# Altium PCB FMC_AWG_DAC_PSU.PcbDoc (part 1 of 2)
Units mm, origin at the board's own origin, x right, y up, seen from the top; angles counter-clockwise.
Board outline 19.1 x 69 mm, 6 copper layers (TOP, L2, L3, L4, L5, BOTTOM), stack 1.482 mm thick; 113 components, 49 nets, 281 pads, 213 vias.
Unrouted connection lines stored in the file: 1.
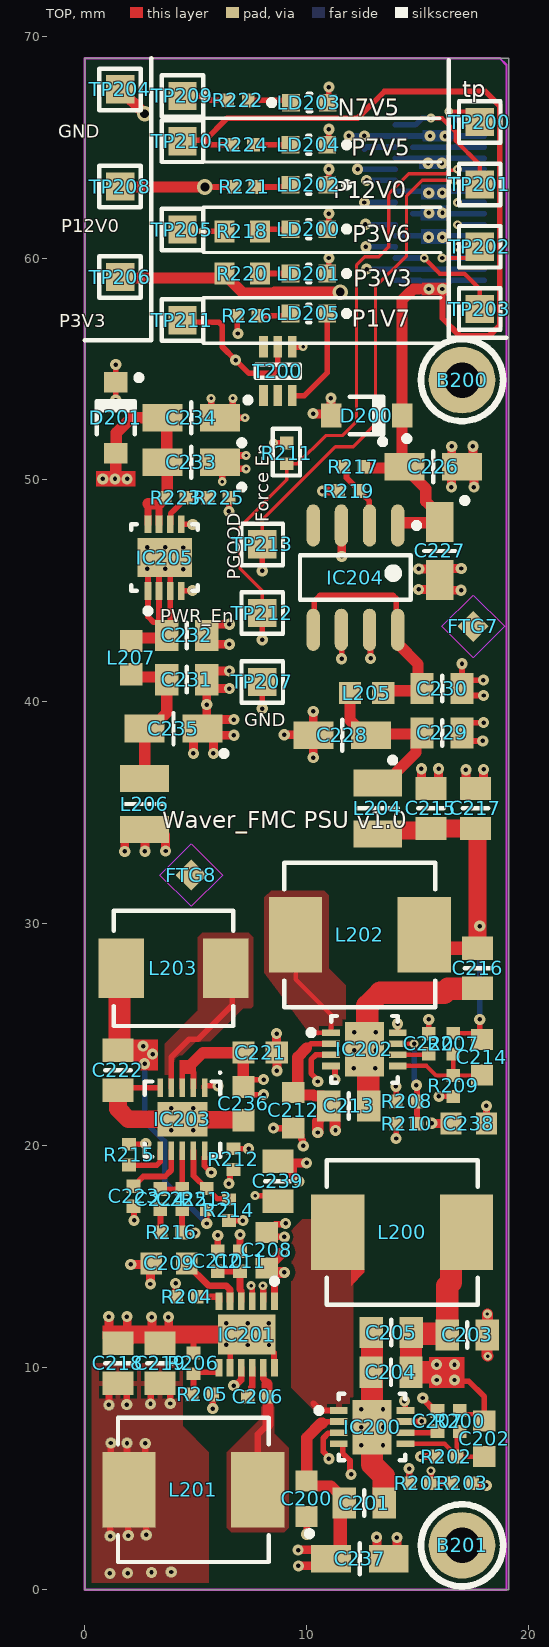
[diagram p0: TOP view]
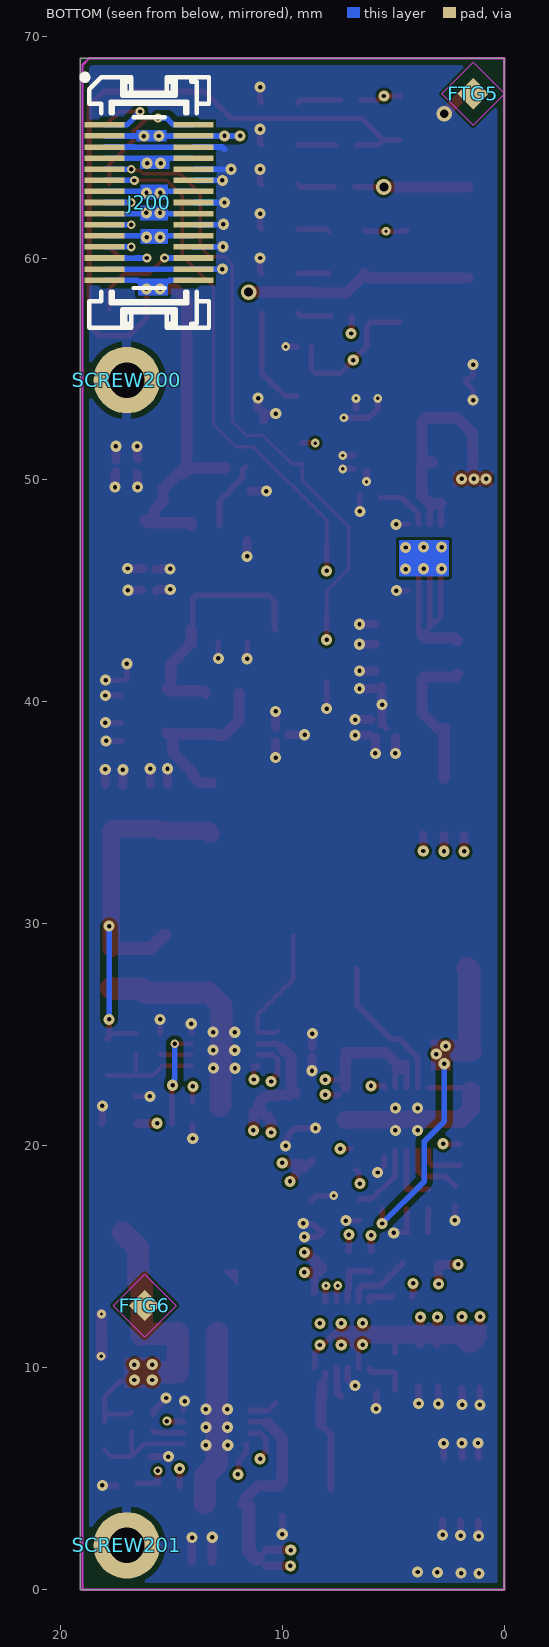
[diagram p1: BOTTOM view, seen from below]
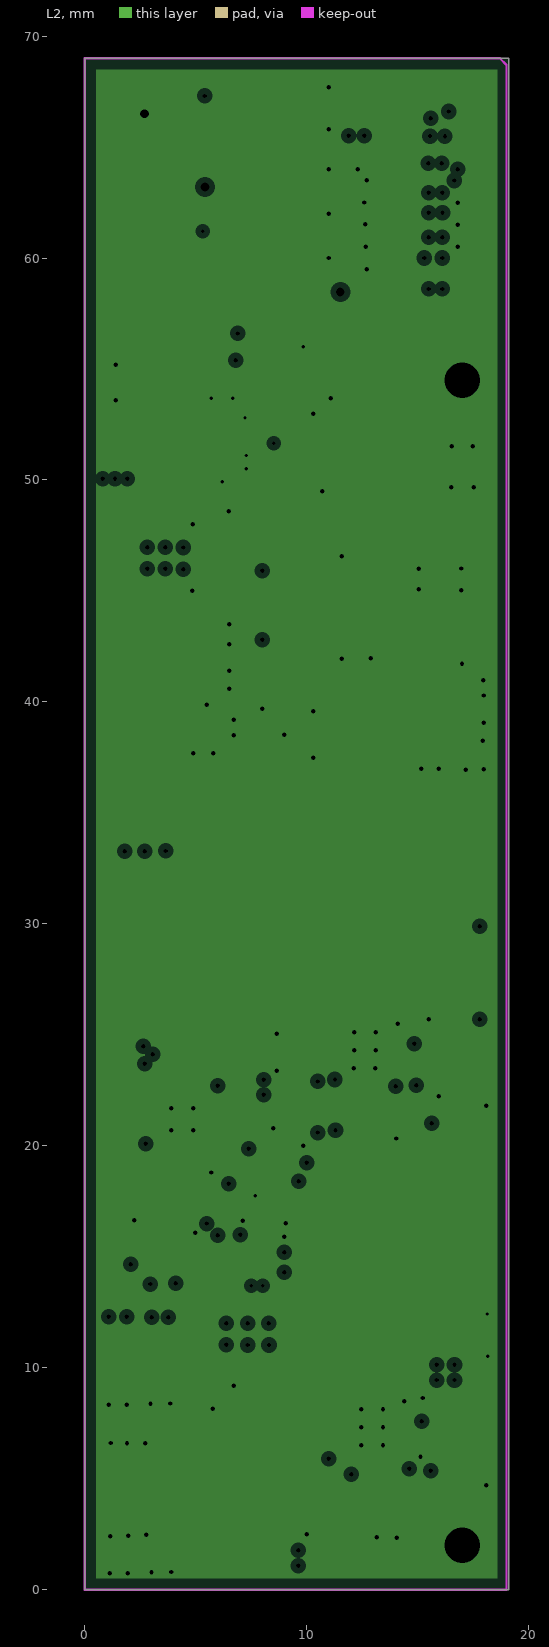
[diagram p2: L2, clearances drawn from the general rule]
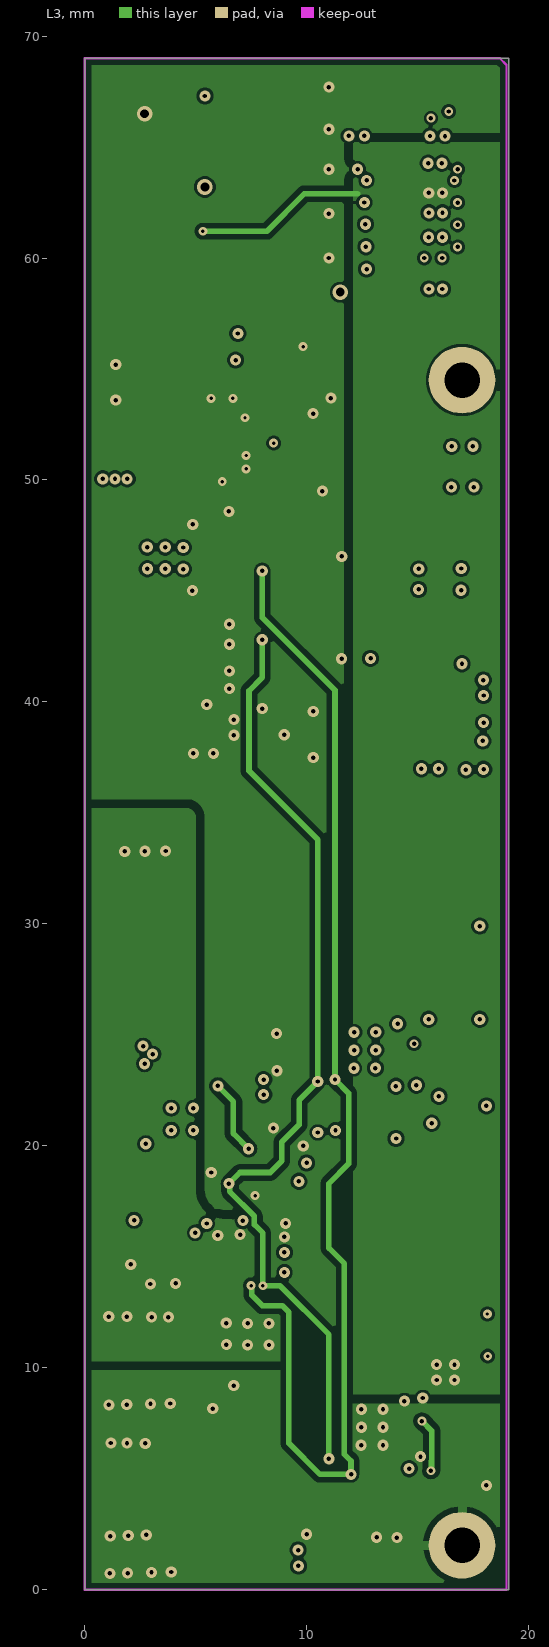
[diagram p3: L3]
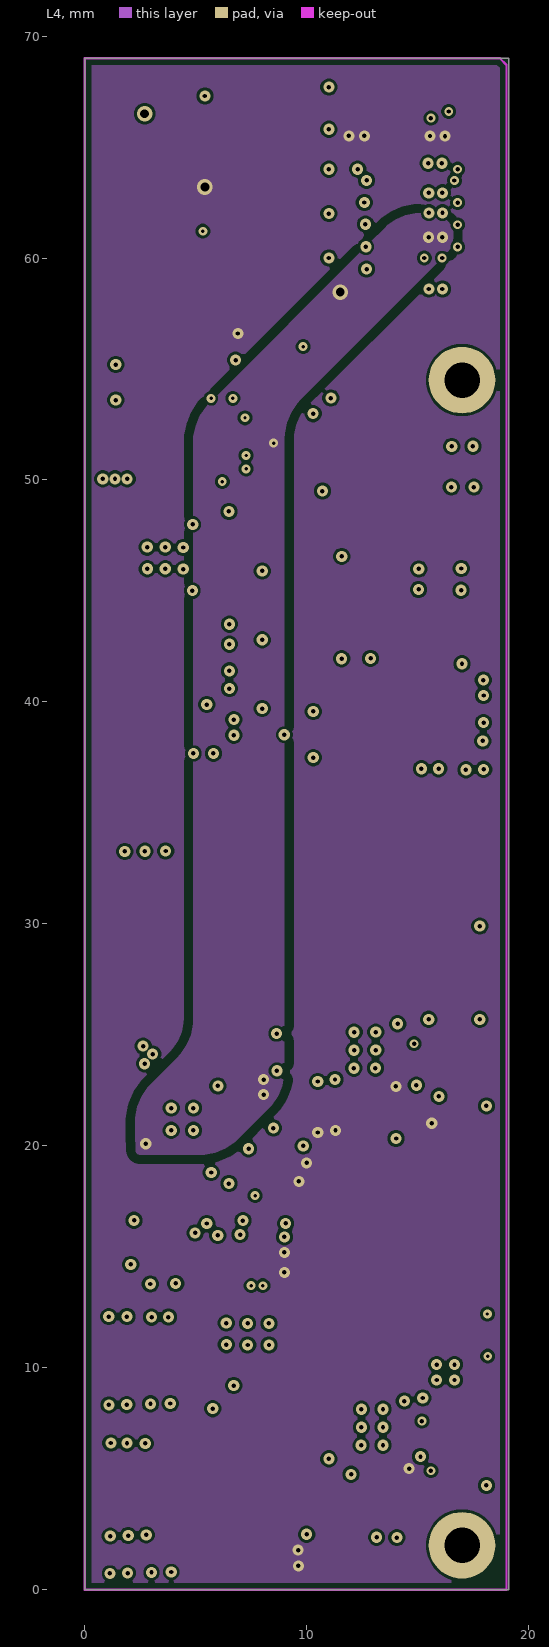
[diagram p4: L4]
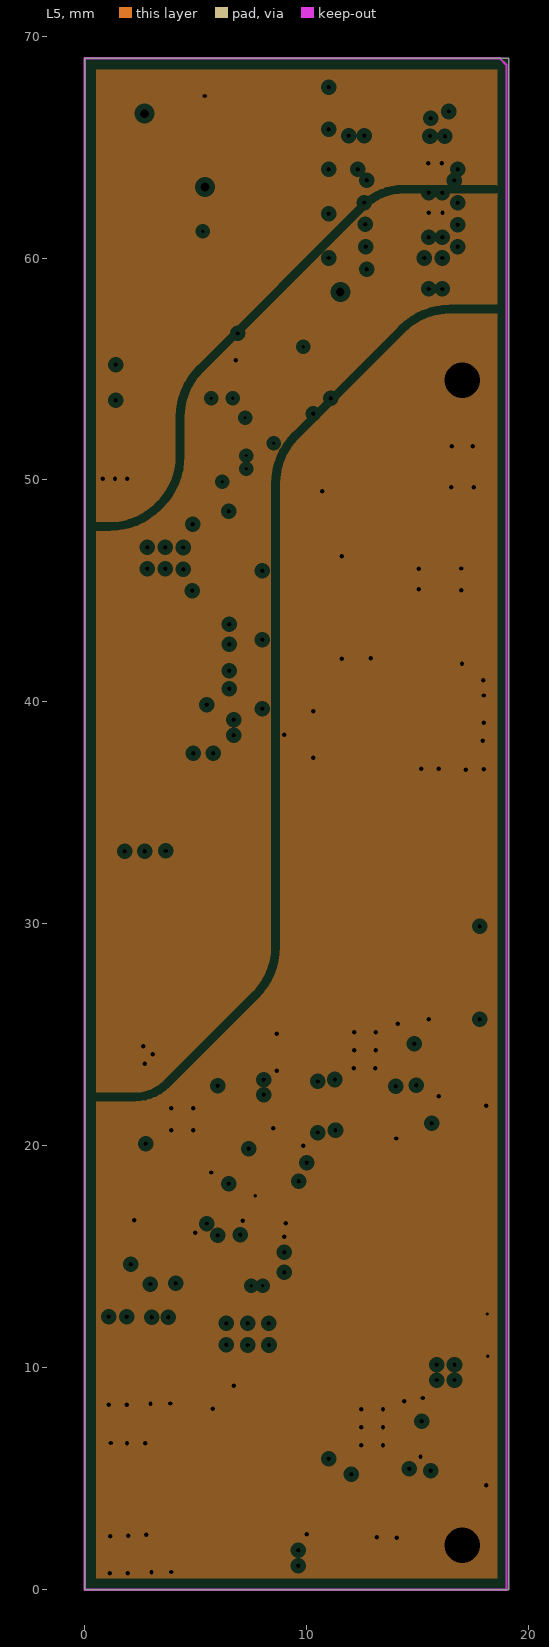
[diagram p5: L5, clearances drawn from the general rule]
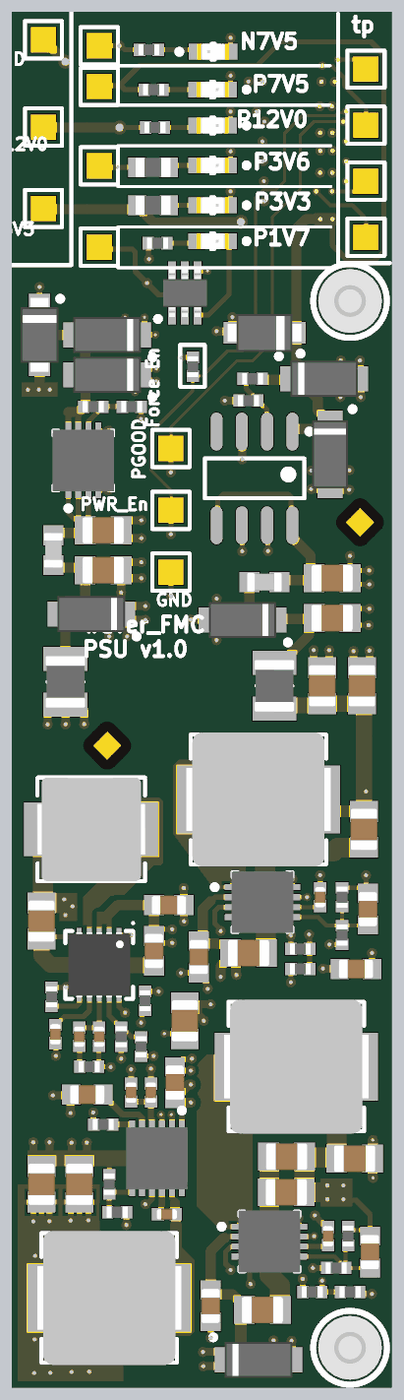
[diagram p7: 3D render of the assembled board from above, using the file's embedded part models]

## Layer stack, top to bottom
TopSolder: solder mask 0.022, Solder Resist, Dk 3.5
TOP: signal copper 0.035
Dielectric1: prepreg 0.12, FR-4, Dk 4.8
L2: plane copper 0.018, net GND
Dielectric2: core 0.2, FR-4, Dk 4.8
L3: signal copper 0.018
Dielectric 3: prepreg 0.7, FR-4, Dk 4.8
L4: signal copper 0.018
Dielectric 4: core 0.2, FR-4, Dk 4.8
L5: plane copper 0.018, net (Multiple Nets)
Dielectric5: prepreg 0.12, FR-4, Dk 4.8
BOTTOM: signal copper 0.035
BottomSolder: solder mask 0.022, Solder Resist, Dk 3.5

## Board outline
0,0 0,64 0,69 19.1,69 19.1,0

## Design rules (kind name [scope] priority, off if disabled: settings)
AcuteAngle [All] p1: minimum=4.50000000000000E+0001 checktracksonly=FALSE
AssemblyTestPointUsage [All] p1 off:
AssemblyTestpoint [All] p1 off: testpointundercomponent=TRUE minsize=1.016 maxsize=2.54 preferedsize=1.524 minholesize=0 maxholesize=1.016 preferedholesize=0.813 testpointgrid=0.025 usegrid=TRUE gridtolerance=0 allowsidetop=TRUE allowsidebottom=TRUE
Clearance [All] p1: gap=0.127 ignorepadtopadclearanceinfootprint=FALSE except(0.254: Track-Poly; 0.41: Poly-Poly)
ComponentClearance NO_DRC [InComponentClass('NO_DRC')] p1 off: gap=0 collisioncheckmode=3 verticalgap=2540 showdistances=FALSE
ComponentClearance [All] p2 off: gap=0.025 collisioncheckmode=3 verticalgap=2540 showdistances=FALSE
DiffPairsRouting [All] p1: maxlimit=0.305 minlimit=0.203 mostfreqgap=0.254 toplayer_minwidth=0.381 toplayer_maxwidth=0.381 toplayer_prefwidth=0.381 midlayer1_minwidth=0.381 midlayer1_maxwidth=0.381 midlayer1_prefwidth=0.381 midlayer2_minwidth=0.381 midlayer2_maxwidth=0.381 midlayer2_prefwidth=0.381 bottomlayer_minwidth=0.381 bottomlayer_maxwidth=0.381 bottomlayer_prefwidth=0.381 maxuncoupledlength=15.24
FabricationTestPointUsage TestPointUsage [All] p1 off: valid=0 allowmultiple=FALSE
FabricationTestpoint Testpoint [All] p1 off: side=3 testpointundercomponent=TRUE minsize=1.016 maxsize=2.54 preferedsize=1.524 minholesize=0 maxholesize=1.016 preferedholesize=0.813 testpointgrid=0.025 allowsidetop=TRUE allowsidebottom=TRUE usegrid=TRUE gridtolerance=0
FanoutControl Fanout_BGA [IsBGA] p1 off: bgadir=Out bgaviamode=Centered fanoutstyle=Auto fanoutdirection=Alternating viagrid=0.025 // Fanout_BGA (Default Rule)
FanoutControl Fanout_LCC [IsLCC] p2 off: bgadir=Out bgaviamode=Centered fanoutstyle=Auto fanoutdirection=Alternating viagrid=0.025 // Fanout_LCC (Default Rule)
FanoutControl Fanout_SOIC [IsSOIC] p3 off: bgadir=Out bgaviamode=Centered fanoutstyle=Auto fanoutdirection=Alternating viagrid=0.025 // Fanout_SOIC (Default Rule)
FanoutControl Fanout_Small [(CompPinCount < 5)] p4 off: bgadir=Out bgaviamode=Centered fanoutstyle=Auto fanoutdirection=OutThenIn viagrid=0.025 // Fanout_Small (Default Rule)
FanoutControl Fanout_Default [All] p5 off: bgadir=Out bgaviamode=Centered fanoutstyle=Auto fanoutdirection=Alternating viagrid=0.025 // Fanout_Default (Default Rule)
Height Height_Top [OnTop] p1 off: minheight=0 maxheight=9.398 prefheight=8.89
Height Height_Bot [OnBottom] p2 off: minheight=0 maxheight=1.473 prefheight=1.321
HoleSize [All] p1: absolutevalues=TRUE maxlimit=25.4 minlimit=0.15 maxpercent=80.000 minpercent=20.000
HoleToHoleClearance [All] p1: gap=0.127 allowstackedmicrovias=TRUE
MinimumAnnularRing [All] p1: minimumring=0.1
MinimumSolderMaskSliver [All] p1 off: minsoldermaskwidth=0.025
PlaneClearance [All] p1: clearance=0.25
PlaneConnect Vias_Plane [IsVia] p1: planeconnectstyle=Direct reliefexpansion=0.508 reliefentries=4 reliefconductorwidth=0.254 reliefairgap=0.254
PlaneConnect [All] p2: planeconnectstyle=Relief reliefexpansion=0.203 reliefentries=4 reliefconductorwidth=0.254 reliefairgap=0.203
PolygonConnect PolygonConnect_L* [InComponent('L*')] p1: connectstyle=Direct reliefconductorwidth=0.254 reliefentries=4 polygonreliefangle="90 Angle" airgapwidth=0.254
PolygonConnect Vias [IsVia] p2: connectstyle=Direct reliefconductorwidth=0.254 reliefentries=4 polygonreliefangle="90 Angle" airgapwidth=0.254
PolygonConnect [All] p3: thpad.connectstyle=Relief thpad.reliefconductorwidth=0.406 thpad.reliefentries=4 thpad.polygonreliefangle="90 Angle" thpad.airgapwidth=0.254 smdpad.connectstyle=Relief smdpad.reliefconductorwidth=0.254 smdpad.reliefentries=4 smdpad.polygonreliefangle="90 Angle" smdpad.airgapwidth=0.15 via.connectstyle=Direct via.reliefconductorwidth=0.406 via.reliefentries=4 via.polygonreliefangle="90 Angle" via.airgapwidth=0.254
RoomDefinition FMC_AWG_DAC_PSU [InComponentClass('FMC_AWG_DAC_PSU')] p1 off: confinementstyle=ConfineIn formatcopy=TRUE lockcomponents=FALSE outline 20.125,1.445 21.6,1.445 21.6,8.3 20.125,8.3
RoomDefinition U_FMC_AWG_DAC_PSU_LDO [InComponentClass('U_FMC_AWG_DAC_PSU_LDO')] p2 off: confinementstyle=ConfineIn formatcopy=TRUE lockcomponents=FALSE outline 21.4,9.2 20.4,9.2 20.4,14.9 21.4,14.9
RoutingCorners [All] p1 off: cornerstyle=45-Degree minsetback=2.54 maxsetback=2.54
RoutingLayers [All] p1 off: top layer_v5=TRUE mid layer 1_v5=TRUE mid layer 2_v5=TRUE bottom layer_v5=TRUE
RoutingVias [All] p1: holewidth=0.2 width=0.4 viastyle="Through Hole" minholewidth=0.15 minwidth=0.4 maxholewidth=0.5 maxwidth=0.8
ShortCircuit SMA_1 [InPadClass('SMA')] p2: allowed=TRUE
SilkToSilkClearance [All] p1 off: silktosilkclearance=0.051
SilkToSolderMaskClearance SilkscreenOverComponentPads [IsPad] p1 off: minsilkscreentomaskgap=0.051 clearancetoexposedcopper=TRUE
SolderMaskExpansion SolderMaskExpansion_1 [IsVia] p1: expansion=0 istentingtop=TRUE
SolderMaskExpansion [All] p2: expansion=0.05 istentingtop=FALSE
ViasUnderSMD ViasUnderSMD_allow [HasFootprint('SON45P300X300X80-13N-R175X248') or  HasFootprint('SON50P300X300X80-11N-R175X248') or HasFootprint('SON50P300X300X80-13N-R160X260') or HasFootprint('SON50P300X80_HS-11N') or HasFootprint('SON50P300X300X80-13N-R180X260') or HasFootprint('SON50P300X300X80-9N-R175X248') or HasFootprint('SON50P300X300X80-9N-R175X248')] p1: allowed=TRUE
ViasUnderSMD [All] p2: allowed=FALSE
Width Width_1 [InNetClass('Buff_data')] p1 off: maxlimit=0.162 minlimit=0.095 preferedwidth=0.135 toplayer_minwidth=0.111 midlayer1_maxwidth=0.156 midlayer1_prefwidth=0.123 midlayer2_minwidth=0.098 midlayer2_maxwidth=0.161 midlayer2_prefwidth=0.127 bottomlayer_minwidth=0.111 minimp=45.000000 maximp=55.000000 favimp=50.000000
Width Width_3 [(InNet('RF1') OR InNet('RF2') OR InNet('RF3') OR InNet('RF4') OR InNet('RF5') OR InNet('RF6') OR InNet('RF7') OR InNet('EXT_CLK_IN'))] p2 off: maxlimit=0.145 minlimit=0.105 preferedwidth=0.135 toplayer_minwidth=0.12 midlayer1_maxwidth=0.135 midlayer1_prefwidth=0.123 midlayer2_minwidth=0.109 midlayer2_maxwidth=0.139 midlayer2_prefwidth=0.127 bottomlayer_minwidth=0.12 minimp=48.000000 maximp=53.000000 favimp=50.000000
Width Width_Pair_Diff [All] p3 off: maxlimit=0.5 minlimit=0.2 preferedwidth=0.3 checkconnectedcopper=TRUE
Width [All] p4: maxlimit=2.54 minlimit=0.1 preferedwidth=0.254 minimp=45.000000 maximp=110.000000 favimp=100.000000 checkconnectedcopper=TRUE
9 further rules are at their usual default settings.

## Classes and differential pairs
component class FMC_AWG_DAC_PSU: C200 C201 C202 C203 C204 C205 C206 C207 C208 C209 C210 C211 C212 C213 C214 C215 C216 C217 C218 C219 C220 C221 C222 C223 C224 C225 C236 C237 C238 C239 FTG5 FTG6 FTG7 FTG8 IC200 IC201 IC202 IC203 J200 L200 L201 L202 L203 R200 R201 R202 R203 R204 R205 R206 R207 R208 R209 R210 R211 R212 R213 R214 R215 R216 TP200 TP201 TP202 TP203 TP212 TP213
pad class Direc: J3-37 J3-38
pad class SMA: J7-2
component class U_FMC_AWG_DAC_PSU_LDO: B200 B201 C226 C227 C228 C229 C230 C231 C232 C233 C234 C235 D200 D201 IC204 IC205 L204 L205 L206 L207 LD200 LD201 LD202 LD203 LD204 LD205 R217 R218 R219 R220 R221 R222 R223 R224 R225 R226 SCREW200 SCREW201 T200 TP204 TP205 TP206 TP207 TP208 TP209 TP210 TP211

## Components (designator, comment, footprint, x,y, rotation, side; value= is the part's Value field where it differs from the comment)
B200 "Plated Hole" c300h160 17,54.5 r0 top
B201 "Plated Hole" c300h160 17,2 r0 top
C200 "2.2uF" CAPC1608X87N 10,4.1 r90 top
C201 "22uF" CAPC2012X135N 12.6,3.9 r180 top
C202 "22pF" CAPC1608X87N 18,6.8 r90 top
C203 "22uF" CAPC2012X135N 17.232,11.485 r180 top
C204 "22uF" CAPC2012X135N 13.8,9.8 r0 top
C205 "22uF" CAPC2012X135N 13.814,11.585 r0 top
C206 "100nF" CAPC1005X55N 7.8,8.7 r180 top
C207 "2.2uF" CAPC1005X55N 15.9,7.6 r270 top
C208 "2.2uF" CAPC1608X87N 8.2,15.3 r270 top
C209 "2.2uF" CAPC1608X87N 3.8,14.7 r0 top
C210 "1.5nF" CAPC1005X55N 6,14.8 r270 top
C211 "1.5nF" CAPC1005X55N 7,14.8 r270 top
C212 "2.2uF" CAPC1608X87N 9.4,21.6 r90 top
C213 "22uF" CAPC2012X135N 11.9,21.8 r180 top
C214 "22pF" CAPC1608X87N 17.9,24 r90 top
C215 "22uF" CAPC2012X135N 15.6,35.2 r270 top
C216 "22uF" CAPC2012X135N 17.7,28 r90 top
C217 "22uF" CAPC2012X135N 17.6,35.2 r270 top
C218 "22uF" CAPC2012X135N 1.5,10.2 r90 top
C219 "22uF" CAPC2012X135N 3.4,10.2 r90 top
C220 "2.2uF" CAPC1005X55N 15.5,24.6 r270 top
C221 "10uF" CAPC1608X80N 7.9,24.2 r180 top
C222 "22uF" CAPC2012X135N 1.5,23.4 r90 top
C223 "1.5nF" CAPC1005X55N 2.2,17.73 r90 top
C224 "1.5nF" CAPC1005X55N 3.4,17.6 r90 top
C225 "150pF" CAPC1005X55N 4.4,17.6 r90 top
C226 "10uF" CAPMP3216X180N 15.7,50.6 r0 top
C227 "10uF" CAPMP3216X180N 16,46.8 r270 top
C228 "10uF" CAPMP3216X180N 11.6,38.5 r180 top
C229 "22uF" CAPC2012X135N 16.1,38.6 r180 top
C230 "22uF" CAPC2012X135N 16.1,40.6 r180 top
C231 "22uF" CAPC2012X135N 4.6,41 r180 top
C232 "22uF" CAPC2012X135N 4.6,43 r180 top
C233 "10uF" CAPMP3216X180N 4.8,50.8 r180 top
C234 "10uF" CAPMP3216X180N 4.8,52.8 r180 top
C235 "10uF" CAPMP3216X180N 4,38.8 r180 top
C236 "10uF" CAPC1608X80N 7.15,21.9 r90 top
C237 "10uF" CAPMP3216X180N 12.4,1.4 r0 top
C238 "2.2uF" CAPC1608X87N 17.3,21 r180 top
C239 "22uF" CAPC2012X135N 8.7,18.4 r90 top
D200 "PMEG6020ER" SODFL3517X110N 12.7,52.9 r180 top
D201 "PMEG6020ER" SODFL3517X110N 1.4,52.8 r270 top
FTG5 "Use only in PCB" FIDUCIAL_TOP_S100-200 1.4,67.4 r270 bottom
FTG6 "Use only in PCB" FIDUCIAL_TOP_S100-200 16.2,12.8 r270 bottom
FTG7 "Use only in PCB" FIDUCIAL_TOP_S100-200 17.5,43.4 r270 top
FTG8 "Use only in PCB" FIDUCIAL_TOP_S100-200 4.8,32.2 r270 top
IC200 "LTC3624EDD-2" SON50P300X300X80-9N-R175X248 12.95,7.327 r0 top
IC201 "MAX17577ATC+" SON50P300X300X80-13N-R180X260 7.3,11.5 r270 top
IC202 "LTC3624EDD-2" SON50P300X300X80-9N-R175X248 12.6,24.35 r0 top
IC203 "FAN8060EMPX" SON50P300X80_HS-11N 4.4,21.2 r270 top
IC204 "LT1963AES8#PBF" LT-S8-8_L 12.2,45.6 r270 top
IC205 "LT3015EDD#PBF" SON50P300X300X80-9N-R175X248 3.6,46.5 r90 top
J200 "SlimStack™" MOLEX_52991-0308 16,62.5 r270 bottom locked
L200 "1.5uH" INDM6965X300N 14.3,16.1 r0 top
L201 "6.8uH" INDM6965X300N 4.9,4.5 r180 top
L202 "1.5uH" INDM6965X300N 12.4,29.5 r0 top
L203 "3.3uH" INDM5552X200N 4,28 r180 top
L204 "1uH" INDC2620X100N 13.2,35.2 r90 top
L205 "120R@100MHz" INDC1608X65N 12.7,40.4 r0 top
L206 "1uH" INDC2620X100N 2.7,35.4 r90 top
L207 "120R@100MHz" INDC1608X65N 2.1,42 r90 top
LD200 "Green" LED_KINGBRIGHT_KPH-1608CGCKr 10.1,61.3 r180 top
LD201 "Green" LED_KINGBRIGHT_KPH-1608CGCKr 10.1,59.3 r180 top
LD202 "Green" LED_KINGBRIGHT_KPH-1608CGCKr 10.1,63.3 r180 top
LD203 "Green" LED_KINGBRIGHT_KPH-1608CGCK 10.123,67 r0 top
LD204 "Green" LED_KINGBRIGHT_KPH-1608CGCK 10.1,65.1 r180 top
LD205 "Green" LED_KINGBRIGHT_KPH-1608CGCK 10.1,57.5 r180 top
R200 "75k" RESC1005X40N 16.9,7.6 r90 top
R201 "75k" RESC1005X40N 15.1,4.8 r180 top
R202 "15k" RESC1005X40N 16.3,6 r0 top
R203 "15k" RESC1005X40N 17,4.8 r180 top
R204 "30k" RESC1005X40N 4.6,13.2 r0 top
R205 "240k" RESC1005X40N 5.3,8.8 r0 top
R206 "30k" RESC1005X40N 4.9,10.2 r270 top
R207 "160k" RESC1005X40N 16.6,24.6 r90 top
R208 "75k" RESC1005X40N 14.5,22 r180 top
R209 "13k" RESC1005X40N 16.6,22.7 r90 top
R210 "15k" RESC1005X40N 14.5,21 r0 top
R211 "10k" RESC1005X40N 9.1,51.2 r90 top
R212 "0" RESC1005X40N 6.7,19.4 r90 top
R213 "7k5" RESC1005X40N 5.5,17.6 r270 top
R214 "18k" RESC1005X40N 6.5,17.1 r90 top
R215 "10k" RESC1005X40N 2,19.6 r270 top
R216 "4k7" RESC1005X40N 3.9,16.1 r180 top
R217 "39k" RESC1005X40N 12.1,50.6 r0 top
R218 "1k2" RESC1608X55N 7.1,61.2 r180 top
R219 "7k5" RESC1005X40N 11.9,49.5 r0 top
R220 "1k2" RESC1608X55N 7.1,59.3 r180 top
R221 "10k" RESC1005X40N 7.2,63.2 r180 top
R222 "5k6" RESC1005X40N 6.9,67.1 r0 top
R223 "20k" RESC1005X40N 4.1,49.2 r180 top
R224 "5k6" RESC1005X40N 7.13,65.1 r0 top
R225 "3k9" RESC1005X40N 6.03,49.2 r180 top
R226 "10k" RESC1005X40N 7.33,57.4 r180 top
SCREW200 "M1.6x4" BOSSARD_B1.6X4/BN660_v 17,54.5 r90 bottom
SCREW201 "M1.6x4" BOSSARD_B1.6X4/BN660_v 17,2 r90 bottom
T200 "2N7002DW" SOT65P210X110-6N 8.7,54.9 r90 top
TP200 "Test Point" TPS127 17.8,66.125 r0 top
TP201 "Test Point" TPS127 17.8,63.316 r0 top
TP202 "Test Point" TPS127 17.8,60.508 r0 top
TP203 "Test Point" TPS127 17.8,57.7 r180 top
TP204 "Test Point" TPS127 1.6,67.6 r0 top
TP205 "Test Point" TPS127 4.4,61.28 r180 top
TP206 "Test Point" TPS127 1.6,59.14 r180 top
TP207 "Test Point" TPS127 8,40.9 r270 top
TP208 "Test Point" TPS127 1.6,63.22 r270 top
TP209 "Test Point" TPS127 4.4,67.3 r180 top
TP210 "Test Point" TPS127 4.4,65.26 r180 top
TP211 "Test Point" TPS127 4.4,57.2 r270 top
TP212 "Test Point" TPS127 8,44 r270 top
TP213 "Test Point" TPS127 8,47.1 r270 top

## Footprints (in the part's own frame and the unit in brackets; to place one, negate y for a bottom-side part, rotate by r counter-clockwise, add the part's x,y. Pads: shape width x height; smd on the part's side, far side on the other; paste and mask are expansions set on the pad)
BOSSARD_B1.6X4/BN660_v [mm] "M1.6 L=4mm Philips Head Machine Screw, DIN 7985A, Stainless Steel A2"
  body extent -1.6,-1.6 1.6,1.6, height 1.22
c300h160 [mm] "Plated Through Hole: Hole Dia.=1.6mm Pad Dia.=3mm"
  round 3 hole 1.6: 1(0,0)
  silkscreen extent -1.8,-1.8 1.8,1.8
CAPC1005X55N [mm] "Capacitor, Non-Polarized, Chip; 1.00mm L X 0.50mm W X 0.70mm H, IPC Medium Density"
  rect 0.62x0.62 smd: 1(-0.45,0) 2(0.45,0)
  body extent -0.52,-0.27 0.53,0.28, height 0.55
CAPC1608X80N [mm] "Chip Capacitor, Body 1.6x0.8mm IPC Medium Density"
  rect 1x1 smd: 1(-0.75,0) 2(0.75,0)
  body extent -0.87,-0.47 0.88,0.48, height 0.8
CAPC1608X87N [mm] "Chip Capacitor, Body 1.6x0.8mm IPC Medium Density"
  rect 0.95x1 smd: 1(-0.8,0) 2(0.8,0)
  body extent -0.87,-0.47 0.88,0.48, height 0.87
CAPC2012X135N [mm] "Chip Capacitor, Body 2.0x1.25mm, IPC Medium Density"
  rect 1.05x1.4 smd: 1(-0.9,0) 2(0.9,0)
  silkscreen extent 0,-0.58 0,0.58, body extent -1.05,-0.67 1.05,0.68, height 1.25
CAPMP3216X180N [mm] "Capacitor, Polarized, Molded  Body 3.2x1.6mm, IPC Medium Density"
  rect 1.8x1.25 smd: 1(-1.3,0) 2(1.3,0)
  silkscreen extent -2.4,-0.7 0,1.25, body extent -1.7,-0.9 1.7,0.9, height 1.6
FIDUCIAL_TOP_S100-200 [mm] "Square Fiducial Target, Top Layer, 1.0mm, Top Solder 2.0mm, Keepout =2.0mm"
  rect 1x1 smd rot 45 paste-0.51 mask+0.5: 1(0,0)
  TOP keep-out region: 1.414,0 0,-1.414 -1.414,0 0,1.414
INDC1608X65N [mm] "Chip Inductor, 2-Leads, EIA 0603, Metric 1608, Body 1.6x0.8mm, IPC Medium Density"
  rect 1x1 smd: 1(-0.75,0) 2(0.75,0)
  body extent -0.87,-0.47 0.88,0.48, height 0.65
INDC2620X100N [mm] "Chip Inductor, EIA 1008, Metric 2520, Body 2.60mm L X 2.00mm W X 1.00mm H, IPC Medium Density"
  rect 1.2x2.2 smd: 1(-1.15,0) 2(1.15,0)
  silkscreen extent 0,-0.9 0,0.9, body extent -1.3,-1 1.3,1, height 1
INDM5552X200N [mm] "Inductor, Molded Body; 5.49mm L X 5.18mm W X 2.00mm H, IPC Medium Density"
  rect 2.05x2.7 smd: 1(-2.35,0) 2(2.35,0)
  silkscreen extent -2.7,-2.6 2.7,2.6, body extent -2.74,-2.59 2.75,2.59, height 2
INDM6965X300N [mm] "Inductor Molded Body, Body 6.86mm L X 6.47mm W X 3mm H, IPC Medium Density"
  rect 2.4x3.4 smd: 1(-2.9,0) 2(2.9,0)
  silkscreen extent -3.4,-3.25 3.4,3.25, body extent -3.62,-3.36 3.62,3.36, height 3
LED_KINGBRIGHT_KPH-1608CGCK [mm] "SMT Green LED, Case 0603, Body L 1.6 x W 0.8mm H 0.65mm"
  rect 0.8x0.8 smd: 1(-0.825,0) 2(0.825,0)
  silkscreen extent -1.82,-0.4 0.08,0.4, body extent -0.8,-0.4 0.8,0.4, height 0.65
LED_KINGBRIGHT_KPH-1608CGCKr [mm] "SMT Green LED, Case 0603, Body L 1.6 x W 0.8mm H 0.65mm"
  rect 0.8x0.8 smd: 1(-0.825,0) 2(0.825,0)
  silkscreen extent -1.83,-0.4 0.08,0.4, body extent -0.8,-0.4 0.8,0.4, height 0.65
LT-S8-8_L [mm] "SOIC, 8-Leads, Body 4.9x3.9mm, Pitch 1.27mm, IPC High Density"
  oval 1.9x0.6 smd: 1(-2.35,1.905) 2(-2.35,0.635) 3(-2.35,-0.635) 4(-2.35,-1.905) 5(2.35,-1.905) 6(2.35,-0.635) 7(2.35,0.635) 8(2.35,1.905)
  silkscreen extent -2.47,-2.5 1,2.88, body extent -2,-2.5 2,2.5, height 1.76
MOLEX_52991-0308 [mm] "0.50mm Pitch SlimStack™ Dual Row 30 Circuits Surface Mount Vertical Receptacle (3.00 and 4.00mm Stacking Heights)"
  rect 0.25x1.8 smd: 1(-3.5,-2) 2(-3.5,2) 3(-3,-2) 4(-3,2) 5(-2.5,-2) 6(-2.5,2) 7(-2,-2) 8(-2,2) 9(-1.5,-2) 10(-1.5,2) 11(-1,-2) 12(-1,2) 13(-0.5,-2) 14(-0.5,2) 15(0,-2) 16(0,2) 17(0.5,-2) 18(0.5,2) 19(1,-2) 20(1,2) 21(1.5,-2) 22(1.5,2) 23(2,-2) 24(2,2) 25(2.5,-2) 26(2.5,2) 27(3,-2) 28(3,2) 29(3.5,-2) 30(3.5,2)
  silkscreen extent -5.77,-3.01 5.65,2.7, body extent -5.65,-2.7 5.65,2.7, height 2.32
RESC1005X40N [mm] "Chip Resistor, EIA 0402, Metric 1005, Body 1.0x0.5mm, IPC Medium Density"
  rect 0.58x0.62 smd: 1(-0.47,0) 2(0.47,0)
  body extent -0.52,-0.27 0.53,0.28, height 0.4
RESC1608X55N [mm] "Chip Resistor, EIA 0603, Metric 1608, Body 1.6x0.8mm, IPC Medium Density"
  rect 0.9x1 smd: 1(-0.8,0) 2(0.8,0)
  body extent -0.87,-0.47 0.88,0.48, height 0.55
SODFL3517X110N [mm] "SODFL Diode (SOD123W); 2.60mm W X 1.70mm L X 1.10mm H body, IPC Medium Density"
  rect 0.92x1.08 smd: 1(-1.6,0) 2(1.6,0)
  silkscreen extent -1.93,-0.85 0.75,1.16, body extent -1.85,-0.95 1.85,0.95, height 1.1
SON50P300X80_HS-11N [mm] "SON, 10-Leads, Body 3,00x3,00mm, Pitch 0,50mm, Thermal Pad 2,25x1,55mm, IPC Medium Density"
  rect 0.85x0.25 smd: 1(-1.42,1) 2(-1.42,0.5) 3(-1.42,0) 4(-1.42,-0.5) 5(-1.42,-1) 6(1.42,-1) 7(1.42,-0.5) 8(1.42,0) 9(1.42,0.5) 10(1.42,1)
  rect 1.55x2.25 smd: 11(0,0)
  silkscreen extent -2.15,-1.7 1.7,1.75, body extent -1.63,-1.55 1.63,1.55, height 0.8
SON50P300X300X80-9N-R175X248 [mm] "SON, (DFN) 0.50mm,pitch; 8 pin,3.00mm W X 3.00mm L X 0.80mm H body (w/thermal tab 1.75 X2.48mm), IPC Medium Density"
  rect 0.8x0.3 smd: 1(-1.5,0.75) 2(-1.5,0.25) 3(-1.5,-0.25) 4(-1.5,-0.75) 5(1.5,-0.75) 6(1.5,-0.25) 7(1.5,0.25) 8(1.5,0.75)
  rect 1.75x2.45 smd: 9(0,0)
  silkscreen extent -2.52,-1.5 1.5,1.5, body extent -1.55,-1.55 1.55,1.55, height 0.8
SON50P300X300X80-13N-R180X260 [mm] "SON, 0.50mm Pitch, 12-Pin, 3.00mm W  X 3.00mm L X 0.80mm Height, (w/Thermal Tab 1.8 X 2.6 mm), IPC Medium Density"
  rect 0.8x0.3 smd: 1(-1.5,1.25) 2(-1.5,0.75) 3(-1.5,0.25) 4(-1.5,-0.25) 5(-1.5,-0.75) 6(-1.5,-1.25) 7(1.5,-1.25) 8(1.5,-0.75) 9(1.5,-0.25) 10(1.5,0.25) 11(1.5,0.75) 12(1.5,1.25)
  rect 1.8x2.6 smd: 13(0,0)
  silkscreen extent -2.52,1.13 -2.28,1.38, body extent -1.55,-1.55 1.55,1.55, height 0.8
SOT65P210X110-6N [mm] "SOT363, SC70-6, SOT, 0.65mm Pitch, 6 Pin, 1.25mm W X 2.00mm L X 1.10mm H, IPC Medium Density"
  rect 0.95x0.4 smd: 1(-1.1,0.65) 2(-1.1,0) 3(-1.1,-0.65) 4(1.1,-0.65) 5(1.1,0) 6(1.1,0.65)
  silkscreen extent -1.42,-1 0.3,1.47, body extent -1.2,-1.1 1.2,1.1, height 1.1
TPS127 [mm] "1.27 x  1.27mm SMD Test Point Area"
  rect 1.27x1.27 smd paste-1.27: 1(0,0)
  silkscreen extent -0.94,-0.94 0.94,0.94

## Part data
B200 B201: library part PLATED_HOLE1.6_PAD3.0, "Single Terminal Socket", Author="CERN DEM JMW", ComponentHeight=0mm, Component Type="Standard (No BOM)", CreateDate=05.11.2009, Family="Plated Hole", HelpURL=Undefined, LatestRevisionDate=05.11.2009, Mounted=No, PackageDescription="Plated Through Hole: Hole Dia.=1.6mm Pad Dia.=3.0mm", Part Description="Plated Through Hole: Hole Dia.=1.6mm Pad Dia.=3.0mm", Part Number=PLATED_HOLE1.6_PAD3.0, Pin Count=1, Sense=No, SMD=No, Socket=No, Status=None
C200 C208 C209 C212 C238: library part CC0603_2.2UF_16V_10%_X5R, "Non-polarised capacitor", Case=0603, Manufacturer=GENERIC, Manufacturer1 ComponentHeight=0.9mm, Manufacturer1 Example="YAGEO PHYCOMP", Manufacturer1 Part Number=CC0603KRX5R7BB225, Tolerance=±10%, Voltage=16V, Author="CERN DEM JLC", Component Type=Standard, CreateDate=28.04.2011, HelpURL=\\cern.ch\dfs\Applications\Altium\Datasheets\CC0805_X5R_PHYCOMP_HC.pdf, LatestRevisionDate=28.04.2011, Manufacturer Part Number=CC0603_2.2UF_16V_10%_X5R, Mounted=Yes, Part Description="SMD Multilayer Chip Ceramic Capacitor", Part Number=CC0603_2.2UF_16V_10%_X5R, Pin Count=2, Sense=No, SMD=Yes, Socket=No, Status=Preferred, TC=X5R
C201 C203 C204 C205 C213 C215 C216 C217 C218 C219 C222 C229 C230 C231 C232 C239: library part CC0805_22UF_16V_10%_X5R, "Non-polarised capacitor", Case=0805, Manufacturer=GENERIC, Manufacturer1 ComponentHeight=1.35mm, Manufacturer1 Example=TDK, Manufacturer1 Part Number=C2012X5R1C226KT, Tolerance=±10%, Voltage=16V, Author="CERN DEM JLC", Component Type=Standard, CreateDate=25.10.2012, HelpURL=\\cern.ch\dfs\Applications\Altium\Datasheets\CC0805_X5R_TDK_C.pdf, LatestRevisionDate=25.10.2012, Manufacturer Part Number=CC0805_22UF_16V_10%_X5R, Mounted=Yes, Part Description="SMD Multilayer Chip Ceramic Capacitor", Part Number=CC0805_22UF_16V_10%_X5R, Pin Count=2, Sense=No, SMD=Yes, Socket=No, Status=Preferred, TC=X5R
C202 C214: library part CC0603_22PF_50V_5%_NP0, "Non-polarised capacitor", Case=0603, Manufacturer=GENERIC, Manufacturer1 ComponentHeight=0.87mm, Manufacturer1 Example=PHYCOMP, Manufacturer1 Part Number=223886715229, Tolerance=±5%, Voltage=50V, Author="CERN DEM JLC", Component Type=Standard, CreateDate=03.12.2007, HelpURL=\\cern.ch\dfs\Applications\Altium\Datasheets\CC0603_NP0_PHYCOMP.pdf, LatestRevisionDate=03.12.2007, Manufacturer Part Number=CC0603_22PF_50V_5%_NP0, Mounted=Yes, Part Description="SMD Multilayer Chip Ceramic Capacitor", Part Number=CC0603_22PF_50V_5%_NP0, Pin Count=2, Sense=No, SMD=Yes, Socket=No, Status=Preferred, TC=C0G/NP0
C206: library part CC0402_100NF_16V_10%_X5R, "Non-polarised capacitor", Case=0402, Manufacturer=GENERIC, Manufacturer1 ComponentHeight=0.55mm, Manufacturer1 Example=MURATA, Manufacturer1 Part Number=GRM155R61C104KA88D, Tolerance=±10%, Voltage=16V, Author="CERN DEM JLC", Component Type=Standard, CreateDate=10.12.2013, HelpURL=\\cern.ch\dfs\Applications\Altium\Datasheets\CC0402_X5R_MURATA_GRM.pdf, LatestRevisionDate=10.12.2013, Manufacturer Part Number=CC0402_100NF_16V_10%_X5R, Mounted=Yes, Part Description="SMD Multilayer Chip Ceramic Capacitor", Part Number=CC0402_100NF_16V_10%_X5R, Pin Count=2, Sense=No, SMD=Yes, Socket=No, Status=None, TC=X5R
C207 C220: library part CC0402_2.2UF_16V_10%_X5R, "Non-polarised capacitor", Case=0402, Manufacturer=GENERIC, Manufacturer1 ComponentHeight=0.55mm, Manufacturer1 Example=TDK, Manufacturer1 Part Number=C1005X5R1C225K050, Tolerance=±10%, Voltage=16V, Author="CERN DEM BC", Component Type=Standard, CreateDate=08.02.2021, HelpURL=\\cern.ch\dfs\Applications\Altium\Datasheets\CC0402_X5R_TDK_C.pdf, LatestRevisionDate=08.02.2021, Manufacturer Part Number=CC0402_2.2UF_16V_10%_X5R, Mounted=Yes, Part Description="SMD Multilayer Chip Ceramic Capacitor", Part Number=CC0402_2.2UF_16V_10%_X5R, Pin Count=2, Sense=No, SMD=Yes, Socket=No, Status=Preferred, TC=X5R
C210 C211 C223 C224: library part CC0402_1.5NF_50V_5%_C0G, "Non-polarised capacitor", Case=0402, Manufacturer=GENERIC, Manufacturer1 ComponentHeight=0.55mm, Manufacturer1 Example=KEMET, Manufacturer1 Part Number=C0402C152J5GACTU, Tolerance=±5%, Voltage=50V, Author="CERN DEM BC", Component Type=Standard, CreateDate=02.09.2019, HelpURL="\\cern.ch\dfs\Applications\Altium\Datasheets\CC0402_C0G_KEMET_(Commercial Grade).pdf", LatestRevisionDate=02.09.2019, Manufacturer Part Number=CC0402_1.5NF_50V_5%_C0G, Mounted=Yes, Part Description="SMD Multilayer Chip Ceramic Capacitor", Part Number=CC0402_1.5NF_50V_5%_C0G, Pin Count=2, Sense=No, SMD=Yes, Socket=No, Status=Preferred, TC=C0G/NP0
C221 C236: library part CC0603_10UF_10V_10%_X5R, "Non-polarised capacitor", Case=0603, Manufacturer=GENERIC, Manufacturer1 ComponentHeight=0.8mm, Manufacturer1 Example=MURATA, Manufacturer1 Part Number=GRM188R61A106KE69D, Tolerance=±10%, Voltage=10V, Author="CERN DEM JLC", Component Type=Standard, CreateDate=31/01/2017, HelpURL=\\cern.ch\dfs\Applications\Altium\Datasheets\CC0603_MURATA_GRM188R61A106KE69D.pdf, LatestRevisionDate=31/01/2017, Manufacturer Part Number=CC0603_10UF_10V_10%_X5R, Mounted=Yes, Part Description="SMD Multilayer Chip Ceramic Capacitor", Part Number=CC0603_10UF_10V_10%_X5R, Pin Count=2, Sense=No, SMD=Yes, Socket=No, Status=None, TC=X5R
C225: library part CC0402_150PF_50V_5%_C0G, "Non-polarised capacitor", Case=0402, Manufacturer=GENERIC, Manufacturer1 ComponentHeight=0.55mm, Manufacturer1 Example=KEMET, Manufacturer1 Part Number=C0402C151J5GACTU, Tolerance=±5%, Voltage=50V, Author="CERN DEM JLC", Component Type=Standard, CreateDate=03.12.2007, HelpURL="\\cern.ch\dfs\Applications\Altium\Datasheets\CC0402_C0G_KEMET_(Commercial Grade).pdf", LatestRevisionDate=22.04.2015, Manufacturer Part Number=CC0402_150PF_50V_5%_C0G, Mounted=Yes, Part Description="SMD Multilayer Chip Ceramic Capacitor", Part Number=CC0402_150PF_50V_5%_C0G, Pin Count=2, Sense=No, SMD=Yes, Socket=No, Status=Preferred, TC=C0G/NP0
C226 C227 C228 C233 C234 C235 C237: library part CTE3216-18_10UF_16V_20%_AVX_TCJ, "Polarised capacitor", Case=A, Manufacturer=AVX, Manufacturer Part Number=TCJA106M016R0200, Tolerance=±20%, Voltage=16V, Author="CERN DEM JLC", Component Type=Standard, ComponentHeight=1.8mm, CreateDate=29.03.2012, HelpURL=\\cern.ch\dfs\Applications\Altium\Datasheets\CTE_AVX_TCJ.pdf, LatestRevisionDate=29.03.2012, Mounted=Yes, Part Description="ESR 0R200 Tantalum Solid Electrolytic Chip Capacitor with Conductive Polymer Electrode", Part Number=CTE3216-18_10UF_16V_20%_AVX_TCJ, Pin Count=2, Sense=No, SMD=Yes, Socket=No, Status=Preferred
D200 D201: "Schottky Diode", Case=SOD123, Manufacturer="NXP SEMICONDUCTORS", Power=2A, Voltage=60V, Author="CERN DEM JMW", Bonding=No, Component Type=Standard, ComponentHeight=0.65mm, CreateDate=19.06.2014, Device=PMEG6020ER, HelpURL=\\cern.ch\dfs\Applications\Altium\Datasheets\PMEG6020ER.pdf, LatestRevisionDate=19.06.2014, Manufacturer Part Number=PMEG6020ER, Mounted=Yes, PackageDescription="SODFL Diode (SOD123W); 2.60mm W X 1.70mm L X 1.10mm H body, IPC Medium Density", Part Description="MEGA Schottky Barrier Rectifier", Part Number=PMEG6020ER, Pin Count=2, PressFit=No, Sense=No, SMD=Yes, Socket=No
FTG5 FTG6 FTG7 FTG8: library part FIDUCIAL_TARGET_S100-200, "Fiducial Target", Author="CERN DEM JLC", Component Type="Standard (No BOM)", ComponentHeight=0mm, CreateDate=09.02.2010, Family=Fiducial, HelpURL=Undefined, LatestRevisionDate=04.04.2012, Mounted=No, PackageDescription="Square Fiducial Target, Top Layer, 1.0mm, Top Solder 2.0mm, Keepout =2.0mm", Part Description="Square Fiducial Target, Top Layer, 1.0mm, Top Solder 2.0mm, Keepout =2.0mm", Part Number=FIDUCIAL_TARGET_S100-200, Pin Count=1, Sense=No, SMD=Yes, Socket=No, Status=None
IC200 IC202: "Adjustable, 2A, Synchronous Step-Down Regulator with 3.5µA Quiescent Current", Case=SON8, Manufacturer="LINEAR TECHNOLOGY", Author="CERN DEM HF", Bonding=No, Component Type=Standard, ComponentHeight=0.8mm, CreateDate=18.05.2022, Device=LTC3624EDD-2, HelpURL=\\cern.ch\dfs\Applications\Altium\Datasheets\LTC3624.pdf, LatestRevisionDate=18.05.2022, Manufacturer Part Number=LTC3624EDD-2, Mounted=Yes, PackageDescription="SON, (DFN) 0.50mm Pitch; 8 Pin, 3.00mm W X 3.00mm L X 0.80mm H body (w/Thermal Tab 1.75 X 2.48mm), IPC Medium Density", Part Description="Adjustable, 2A, Synchronous Step-Down Regulator with 3.5µA Quiescent Current", Part Number=LTC3624EDD-2, Pin Count=9, PressFit=No, Sense=No, SMD=Yes, Socket=No
IC201: "4.5V to 60V, 1A High-Efficiency, Synchronous, Inverting Output DC-DC Converters", Case=SON12, Manufacturer=MAXIM, Author="CERN DEM HF", Bonding=No, Component Type=Standard, ComponentHeight=0.8mm, CreateDate=22.10.2021, Device=MAX17577ATC+, HelpURL=\\cern.ch\dfs\Applications\Altium\Datasheets\MAX17577ATC+.pdf, LatestRevisionDate=22.10.2021, Manufacturer Part Number=MAX17577ATC+, Mounted=Yes, PackageDescription="SON, 0.50mm Pitch, 12-Pin, 3.00mm W  X 3.00mm L X 0.80mm H body, (w/Thermal Tab 1.80 X 2.60mm), IPC Medium Density", Part Description="4.5V to 60V, 1A High-Efficiency, Synchronous, Inverting Output DC-DC Converters", Part Number=MAX17577ATC+, Pin Count=13, PressFit=No, Sense=No, SMD=Yes, Socket=No
IC203: library part PM_FAN8060, "2.5 to 5.5 V 1 A 1.2 MHz Step-Down DC/DC", Case=SON10, Manufacturer="ON SEMICONDUCTOR", Author=GK, Bonding=No, Component Type=Standard, ComponentHeight=0.8mm, CreateDate=22.10.2021, Device=FAN8060EMPX, HelpURL=\\cern.ch\dfs\Applications\Altium\Datasheets\FAN5354MPX.pdf, LatestRevisionDate=22.10.2021, Manufacturer Part Number=FAN8060EMPX, Mounted=Yes, PackageDescription="SON, 10-Leads, Body 3,00x3,00mm, Pitch 0,50mm, Thermal Pad 2,25x1,55mm, IPC Medium Density", Part Description="2.5 to 5.5 V 1 A 1.2 MHz Step-Down DC/DC", Part Number=FAN8060EMPX, Pin Count=13, PressFit=No, Sense=No, SMD=Yes, Socket=No
IC204: library part CMP-0476-01595-1, "1.5 A, Low Noise, Fast Transient Response LDO Regulator, 2.1 to 20 V Vin, Adjustable Vout, 8-pin SOIC (S8-8), -40 to 125 degC, Pb-Free", Dropout Voltage(V)=0.34, Manufacturer="Linear Technology", Output Voltage=Adj, Shutdown Current(uA)=0.01, ComponentLink1Description="Manufacturer URL", ComponentLink1URL=http://www.linear.com/, ComponentLink2Description=Datasheet, ComponentLink2URL=http://cds.linear.com/docs/en/datasheet/1963afe.pdf, ComponentLink3Description="Package Specification", ComponentLink3URL=http://cds.linear.com/docs/en/packaging/05081610_G_SO8.pdf, DatasheetVersion="Rev. E", Discrete Pass Element=no, Iout(mA)=1500, Isupply(mA)=1, Mounting Technology="Surface Mount", Noise(uV)=40, Number of Outputs=1, PackageDescription="8-Pin Plastic Small Outline (Narrow .150 Inch), Body 4.9 x 3.9 mm, Pitch 1.27 mm", PackageReference=S8-8, PackageVersion="Rev. G, 03/2012", PartNumber=LT1963AES8#PBF, PSRR(dB)=63, RoHS=TRUE, Vin Max(V)=20, Vin Min(V)=2.1, Vout Max(V)=20, Vout Min(V)=1.21
IC205: "1.5A, Low Noise, Negative Linear Regulator with Precision Current Limit", Case=SON8, Manufacturer="LINEAR TECHNOLOGY", Author="CERN DEM MR", Bonding=No, Component Type=Standard, ComponentHeight=0.8mm, CreateDate=10.02.2016, Device=LT3015EDD#PBF, HelpURL=\\cern.ch\dfs\Applications\Altium\Datasheets\LT3015EDD#PBF.pdf, LatestRevisionDate=10.02.2016, Manufacturer Part Number=LT3015EDD#PBF, Mounted=Yes, PackageDescription="SON, (DFN) 0.50mm,pitch; 8 pin,3.00mm W X 3.00mm L X 0.80mm H body (w/thermal tab 1.75 X2.48mm), IPC Medium Density", Part Description="–1.22V to –29.3V, 1.5A, Low Noise, Negative Linear Regulator with Precision Current Limit", Part Number=LT3015EDD#PBF, Pin Count=9, PressFit=No, Sense=No, SMD=Yes, Socket=No
J200: library part MOLEX_52991-0308, "Connector 30 Female", Manufacturer=MOLEX, Manufacturer Part Number=52991-0308, Author="CERN DEM JLC", ComponentHeight=2.27mm, Component Type=Standard, CreateDate=28.08.2012, Family=SlimStack™, HelpURL=\\cern.ch\dfs\Applications\Altium\Datasheets\MOLEX_52991-0308.pdf, LatestRevisionDate=28.08.2012, Mounted=Yes, Part Description="0.50mm Pitch SlimStack™ Dual Row 30 Circuits Surface Mount Vertical Receptacle (3.00 and 4.00mm Stacking Heights)", Part Number=MOLEX_52991-0308, Pin Count=30, PressFit=No, Sense=No, SMD=Yes, Socket=No, Status=None
L200 L202: library part IND2525_1.5UH_20%_VISHAY_IHLP-2525CZ, "Inductor With Core", Case=2525, Manufacturer="VISHAY DALE", Manufacturer Part Number=IHLP2525CZER1R5M01, Power=9A, Resistance=0.014R, Tolerance=±20%, Author="CERN DEM JLC", Component Type=Standard, ComponentHeight=3mm, CreateDate=24.10.2012, HelpURL=\\cern.ch\dfs\Applications\Altium\Datasheets\IND2525_VISHAY_IHLP-2525CZ.pdf, LatestRevisionDate=24.10.2012, Mounted=Yes, Part Description="Low Profile, High Current IHLP® Inductor", Part Number=IND2525_1.5UH_20%_VISHAY_IHLP-2525CZ, Pin Count=2, Sense=No, SMD=Yes, Socket=No
L201: library part IND2525_6.8UH_20%_VISHAY_IHLP-2525CZ-01, "Inductor With Core", Case=2525, Manufacturer="VISHAY DALE", Manufacturer Part Number=IHLP2525CZER6R8M01, Power=4.5A, Resistance=0.054R, Tolerance=±20%, Author="CERN DEM MR", Component Type=Standard, ComponentHeight=3mm, CreateDate=29.06.2017, HelpURL=\\cern.ch\dfs\Applications\Altium\Datasheets\IND2525_VISHAY_IHLP-2525CZ-01.pdf, LatestRevisionDate=29.06.2017, Mounted=Yes, Part Description="Low Profile, High Current IHLP® Inductor", Part Number=IND2525_6.8UH_20%_VISHAY_IHLP-2525CZ-01, Pin Count=2, Sense=No, SMD=Yes, Socket=No
L203: library part IND2020_3.3UH_20%_VISHAY_IHLP-2020BZ-11, "Inductor With Core", Case=2020, Manufacturer="VISHAY DALE", Manufacturer Part Number=IHLP2020BZER3R3M11, Power=4.1A, Resistance=0.0578R, Tolerance=±20%, Author="CERN DEM MR", Component Type=Standard, ComponentHeight=2mm, CreateDate=04.12.2017, HelpURL=\\cern.ch\dfs\Applications\Altium\Datasheets\IND2020_VISHAY_IHLP2020BZ-11.pdf, LatestRevisionDate=04.12.2017, Mounted=Yes, Part Description="Low Profile, High Current IHLP® Inductor", Part Number=IND2020_3.3UH_20%_VISHAY_IHLP-2020BZ-11, Pin Count=2, Sense=No, SMD=Yes, Socket=No
L204 L206: library part IND1008_1UH_20%_WURTH_74479787210B, "Inductor", Case=1008, Manufacturer="WURTH ELEKTRONIK", Manufacturer Part Number=74479787210B, Power=1.95A, Resistance=0.06R, Tolerance=±20%, Author="CERN DEM JLC", Component Type=Standard, ComponentHeight=1mm, CreateDate=01.10.2014, HelpURL=\\cern.ch\dfs\Applications\Altium\Datasheets\IND_WURTH_WE-PMI_74479787210B.pdf, LatestRevisionDate=01.10.2014, Mounted=Yes, Part Description="Power Multilayer Inductor (WE-PMI Series)", Part Number=IND1008_1UH_20%_WURTH_74479787210B, Pin Count=2, Sense=No, SMD=Yes, Socket=No, Status=None
L205 L207: library part IND0603_MURATA_BLM18SG121TN1D, "Inductor", Case=0603, Manufacturer=MURATA, Manufacturer Part Number=BLM18SG121TN1D, Power=3A, Resistance=0.025R, Tolerance=±25%, Author="CERN DEM JLC", Component Type=Standard, ComponentHeight=0.65mm, CreateDate=23.07.2014, HelpURL=\\cern.ch\dfs\Applications\Altium\Datasheets\IND0603_MURATA_BLM18S.pdf, LatestRevisionDate=23.07.2014, Mounted=Yes, Part Description="SMD EMIFIL Suppression Chip Ferrite Bead", Part Number=IND0603_MURATA_BLM18SG121TN1D, Pin Count=2, Sense=No, SMD=Yes, Socket=No, Status=None
LD200 LD201 LD202: library part LED_0603_Green, "Green 0603", Manufacturer=KINGBRIGHT, Manufacturer Part Number=KPH-1608CGCK, Part Number=LED_KINGBRIGHT_KPH-1608CGCK, Author="CERN DEM JLC", Bonding=No, Color=Green, Component Type=Standard, ComponentHeight=0.65mm, CreateDate=03.07.2017, HelpURL=\\cern.ch\dfs\Applications\Altium\Datasheets\LED_KINGBRIGHT_KPH-1608CGCK.pdf, LatestRevisionDate=03.07.2017, Mounted=Yes, PackageDescription="SMT Green LED, Case 0603, Body L 1.6 x W 0.8mm H 0.65mm", Part Description="SMD Green LED, Case 1.6mmX0.8mm(0603), 0.65mm Thickness", Pin Count=2, PressFit=No, Sense=No, SMD=Yes, Socket=No
LD203 LD204 LD205: library part LED_KINGBRIGHT_KPH-1608CGCK, "LED Green 1C 2A", Manufacturer=KINGBRIGHT, Manufacturer Part Number=KPH-1608CGCK, Author="CERN DEM JLC", Bonding=No, Color=Green, Component Type=Standard, ComponentHeight=0.65mm, CreateDate=03.07.2017, HelpURL=\\cern.ch\dfs\Applications\Altium\Datasheets\LED_KINGBRIGHT_KPH-1608CGCK.pdf, LatestRevisionDate=03.07.2017, Mounted=Yes, PackageDescription="SMT Green LED, Case 0603, Body L 1.6 x W 0.8mm H 0.65mm", Part Description="SMD Green LED, Case 1.6mmX0.8mm(0603), 0.65mm Thickness", Part Number=LED_KINGBRIGHT_KPH-1608CGCK, Pin Count=2, PressFit=No, Sense=No, SMD=Yes, Socket=No
R200 R201 R208: library part R0402_75K_1%_0.0625W_100PPM, "Resistor - 1%", Case=0402, Manufacturer=GENERIC, Manufacturer1 ComponentHeight=0.4mm, Manufacturer1 Example="YAGEO PHYCOMP", Manufacturer1 Part Number=232270677503L, Power=0.0625W, Tolerance=±1%, Author="CERN DEM JLC", Component Type=Standard, CreateDate=03.12.2007, HelpURL=\\cern.ch\dfs\Applications\Altium\Datasheets\R0402_Phycomp_RC0402.pdf, LatestRevisionDate=17.10.2012, Manufacturer Part Number=R0402_75K_1%_0.0625W_100PPM, Mounted=Yes, Part Description="General Purpose Thick Film Chip Resistor", Part Number=R0402_75K_1%_0.0625W_100PPM, Pin Count=2, PressFit=No, Sense=No, SMD=Yes, Socket=No, Status="Not Recommended", TC=±100ppm/°C
R202 R203 R210: library part R0402_15K_1%_0.0625W_100PPM, "Resistor - 1%", Case=0402, Manufacturer=GENERIC, Manufacturer1 ComponentHeight=0.4mm, Manufacturer1 Example=VISHAY, Manufacturer1 Part Number=CRCW040215K0FK, Power=0.0625W, Tolerance=±1%, Author="CERN DEM JMW", Component Type=Standard, CreateDate=06.07.2015, HelpURL="\\cern.ch\dfs\Applications\Altium\Datasheets\R0402_VISHAY_CRCW e3.pdf", LatestRevisionDate=06.07.2015, Manufacturer Part Number=R0402_15K_1%_0.0625W_100PPM, Mounted=Yes, Part Description="General Purpose Thick Film Chip Resistor", Part Number=R0402_15K_1%_0.0625W_100PPM, Pin Count=2, PressFit=No, Sense=No, SMD=Yes, Socket=No, Status=None, TC=±100ppm/°C
R204 R206: library part R0402_30K_1%_0.0625W_100PPM, "Resistor - 1%", Case=0402, Manufacturer=GENERIC, Manufacturer1 ComponentHeight=0.4mm, Manufacturer1 Example="YAGEO PHYCOMP", Manufacturer1 Part Number=232270673003L, Power=0.0625W, Tolerance=±1%, Author="CERN DEM JLC", Component Type=Standard, CreateDate=03.12.2007, HelpURL=\\cern.ch\dfs\Applications\Altium\Datasheets\R0402_Phycomp_RC0402.pdf, LatestRevisionDate=17.10.2012, Manufacturer Part Number=R0402_30K_1%_0.0625W_100PPM, Mounted=Yes, Part Description="General Purpose Thick Film Chip Resistor", Part Number=R0402_30K_1%_0.0625W_100PPM, Pin Count=2, PressFit=No, Sense=No, SMD=Yes, Socket=No, Status="Not Recommended", TC=±100ppm/°C
R205: library part R0402_240K_1%_0.0625W_100PPM, "Resistor - 1%", Case=0402, Manufacturer=GENERIC, Manufacturer1 ComponentHeight=0.4mm, Manufacturer1 Example="YAGEO PHYCOMP", Manufacturer1 Part Number=232270672404L, Power=0.0625W, Tolerance=±1%, Author="CERN DEM JLC", Component Type=Standard, CreateDate=03.12.2007, HelpURL=\\cern.ch\dfs\Applications\Altium\Datasheets\R0402_Phycomp_RC0402.pdf, LatestRevisionDate=17.10.2012, Manufacturer Part Number=R0402_240K_1%_0.0625W_100PPM, Mounted=Yes, Part Description="General Purpose Thick Film Chip Resistor", Part Number=R0402_240K_1%_0.0625W_100PPM, Pin Count=2, PressFit=No, Sense=No, SMD=Yes, Socket=No, Status="Not Recommended", TC=±100ppm/°C
R207: library part R0402_160K_1%_0.0625W_100PPM, "Resistor - 1%", Case=0402, Manufacturer=GENERIC, Manufacturer1 ComponentHeight=0.4mm, Manufacturer1 Example="YAGEO PHYCOMP", Manufacturer1 Part Number=232270671604L, Power=0.0625W, Tolerance=±1%, Author="CERN DEM JLC", Component Type=Standard, CreateDate=03.12.2007, HelpURL=\\cern.ch\dfs\Applications\Altium\Datasheets\R0402_Phycomp_RC0402.pdf, LatestRevisionDate=17.10.2012, Manufacturer Part Number=R0402_160K_1%_0.0625W_100PPM, Mounted=Yes, Part Description="General Purpose Thick Film Chip Resistor", Part Number=R0402_160K_1%_0.0625W_100PPM, Pin Count=2, PressFit=No, Sense=No, SMD=Yes, Socket=No, Status="Not Recommended", TC=±100ppm/°C
R209: library part R0402_13K_1%_0.0625W_100PPM, "Resistor - 1%", Case=0402, Manufacturer=GENERIC, Manufacturer1 ComponentHeight=0.4mm, Manufacturer1 Example="YAGEO PHYCOMP", Manufacturer1 Part Number=232270671303L, Power=0.0625W, Tolerance=±1%, Author="CERN DEM JLC", Component Type=Standard, CreateDate=03.12.2007, HelpURL=\\cern.ch\dfs\Applications\Altium\Datasheets\R0402_Phycomp_RC0402.pdf, LatestRevisionDate=17.10.2012, Manufacturer Part Number=R0402_13K_1%_0.0625W_100PPM, Mounted=Yes, Part Description="General Purpose Thick Film Chip Resistor", Part Number=R0402_13K_1%_0.0625W_100PPM, Pin Count=2, PressFit=No, Sense=No, SMD=Yes, Socket=No, Status="Not Recommended", TC=±100ppm/°C
R211 R215 R221 R226: library part R0402_10K_1%_0.0625W_100PPM, "Resistor - 1%", Case=0402, Manufacturer=GENERIC, Manufacturer1 ComponentHeight=0.4mm, Manufacturer1 Example="YAGEO PHYCOMP", Manufacturer1 Part Number=232270671003L, Power=0.0625W, Tolerance=±1%, Author="CERN DEM JLC", Component Type=Standard, HelpURL=\\cern.ch\dfs\Applications\Altium\Datasheets\R0402_Phycomp_RC0402.pdf, Manufacturer Part Number=R0402_10K_1%_0.0625W_100PPM, Mounted=Yes, Part Description="General Purpose Thick Film Chip Resistor", Part Number=R0402_10K_1%_0.0625W_100PPM, Pin Count=2, Sense=No, SMD=Yes, Socket=No, TC=±100ppm/°C
  R211 R226: CreateDate=03.12.2007, LatestRevisionDate=17.10.2012, PressFit=No, Status="Not Recommended"
  R215: CreateDate=03-Dec-07, LatestRevisionDate=17-Oct-12, PressFit=No, Status="Not Recommended"
  R221: CreateDate=03.12.2007, LatestRevisionDate=17.10.2012, Status="Not recommended"
R212: library part R0402_0R_JUMPER, "Resistor", Case=0402, Manufacturer=GENERIC, Manufacturer1 ComponentHeight=0.4mm, Manufacturer1 Example="YAGEO PHYCOMP", Manufacturer1 Part Number=232270591001L, Author="CERN DEM JLC", Component Type=Standard, CreateDate=03/12/2007, HelpURL=\\cern.ch\dfs\Applications\Altium\Datasheets\R0402_Phycomp_RC0402.pdf, LatestRevisionDate=17/10/2012, Manufacturer Part Number=R0402_0R_JUMPER, Mounted=Yes, Part Description="1A (0.05R Max DC Resistance) Zero Ohm Jumper", Part Number=R0402_0R_JUMPER, Pin Count=2, PressFit=No, Sense=No, SMD=Yes, Socket=No, Status="Not Recommended"
R213 R219: library part R0402_7K5_1%_0.0625W_100PPM, "Resistor - 1%", Case=0402, Manufacturer=GENERIC, Manufacturer1 ComponentHeight=0.4mm, Manufacturer1 Example="YAGEO PHYCOMP", Manufacturer1 Part Number=232270677502L, Power=0.0625W, Tolerance=±1%, Author="CERN DEM JLC", Component Type=Standard, CreateDate=03.12.2007, HelpURL=\\cern.ch\dfs\Applications\Altium\Datasheets\R0402_Phycomp_RC0402.pdf, LatestRevisionDate=17.10.2012, Manufacturer Part Number=R0402_7K5_1%_0.0625W_100PPM, Mounted=Yes, Part Description="General Purpose Thick Film Chip Resistor", Part Number=R0402_7K5_1%_0.0625W_100PPM, Pin Count=2, PressFit=No, Sense=No, SMD=Yes, Socket=No, Status="Not Recommended", TC=±100ppm/°C
R214: library part R0402_18K_1%_0.0625W_100PPM, "Resistor - 1%", Case=0402, Manufacturer=GENERIC, Manufacturer1 ComponentHeight=0.4mm, Manufacturer1 Example="YAGEO PHYCOMP", Manufacturer1 Part Number=232270671803L, Power=0.0625W, Tolerance=±1%, Author="CERN DEM JLC", Component Type=Standard, CreateDate=03.12.2007, HelpURL=\\cern.ch\dfs\Applications\Altium\Datasheets\R0402_Phycomp_RC0402.pdf, LatestRevisionDate=17.10.2012, Manufacturer Part Number=R0402_18K_1%_0.0625W_100PPM, Mounted=Yes, Part Description="General Purpose Thick Film Chip Resistor", Part Number=R0402_18K_1%_0.0625W_100PPM, Pin Count=2, PressFit=No, Sense=No, SMD=Yes, Socket=No, Status="Not Recommended", TC=±100ppm/°C
R216: library part R0402_4K7_1%_0.0625W_100PPM, "Resistor - 1%", Case=0402, Manufacturer=GENERIC, Manufacturer1 ComponentHeight=0.4mm, Manufacturer1 Example="YAGEO PHYCOMP", Manufacturer1 Part Number=232270674702L, Power=0.0625W, Tolerance=±1%, Author="CERN DEM JLC", Component Type=Standard, CreateDate=03.12.2007, HelpURL=\\cern.ch\dfs\Applications\Altium\Datasheets\R0402_Phycomp_RC0402.pdf, LatestRevisionDate=17.10.2012, Manufacturer Part Number=R0402_4K7_1%_0.0625W_100PPM, Mounted=Yes, Part Description="General Purpose Thick Film Chip Resistor", Part Number=R0402_4K7_1%_0.0625W_100PPM, Pin Count=2, PressFit=No, Sense=No, SMD=Yes, Socket=No, Status="Not Recommended", TC=±100ppm/°C
R217: library part R0402_39K_1%_0.0625W_100PPM, "Resistor - 1%", Case=0402, Manufacturer=GENERIC, Manufacturer1 ComponentHeight=0.4mm, Manufacturer1 Example="YAGEO PHYCOMP", Manufacturer1 Part Number=232270673903, Power=0.0625W, Tolerance=±1%, Author="CERN DEM JLC", Component Type=Standard, CreateDate=03.12.2007, HelpURL=\\cern.ch\dfs\Applications\Altium\Datasheets\R0402_Phycomp_RC0402.pdf, LatestRevisionDate=17.10.2012, Manufacturer Part Number=R0402_39K_1%_0.0625W_100PPM, Mounted=Yes, Part Description="General Purpose Thick Film Chip Resistor", Part Number=R0402_39K_1%_0.0625W_100PPM, Pin Count=2, PressFit=No, Sense=No, SMD=Yes, Socket=No, Status="Not Recommended", TC=±100ppm/°C
R218 R220: library part R0603_1K2_1%_0.1W_100PPM, "Resistor - 1%", Case=0603, Manufacturer=GENERIC, Manufacturer1 ComponentHeight=0.55mm, Manufacturer1 Example="NIC COMPONENT", Manufacturer1 Part Number=NRC06F1201TRF, Power=0.1W, Tolerance=±1%, Author="CERN DEM JLC", Component Type=Standard, CreateDate=03.12.2007, HelpURL=\\cern.ch\dfs\Applications\Altium\Datasheets\R0603_NIC_NRC.pdf, LatestRevisionDate=13.03.2008, Manufacturer Part Number=R0603_1K2_1%_0.1W_100PPM, Mounted=Yes, Part Description="General Purpose Thick Film Chip Resistor", Part Number=R0603_1K2_1%_0.1W_100PPM, Pin Count=2, Sense=No, SMD=Yes, Socket=No, Status=Preferred, TC=±100ppm/°C
R222 R224: library part R0402_5k6_1%_0.0625W_100PPM, "Resistor - 1%", Case=0402, Manufacturer=GENERIC, Manufacturer1 ComponentHeight=0.4mm, Manufacturer1 Example="YAGEO PHYCOMP", Manufacturer1 Part Number=232270675602L, Manufacturer Part Number=R0402_5K6_1%_0.0625W_100PPM, Power=0.0625W, Tolerance=±1%, Author="CERN DEM JLC", Component Type=Standard, CreateDate=03.12.2007, HelpURL=\\cern.ch\dfs\Applications\Altium\Datasheets\R0402_Phycomp_RC0402.pdf, LatestRevisionDate=17.10.2012, Mounted=Yes, Part Description="General Purpose Thick Film Chip Resistor", Part Number=R0402_5K6_1%_0.0625W_100PPM, Pin Count=2, PressFit=No, Sense=No, SMD=Yes, Socket=No, Status="Not Recommended", TC=±100ppm/°C
R223: library part R0402_20K_1%_0.0625W_100PPM, "Resistor - 1%", Case=0402, Manufacturer=GENERIC, Manufacturer1 ComponentHeight=0.4mm, Manufacturer1 Example="YAGEO PHYCOMP", Manufacturer1 Part Number=232270672003L, Power=0.0625W, Tolerance=±1%, Author="CERN DEM JLC", Component Type=Standard, CreateDate=03.12.2007, HelpURL=\\cern.ch\dfs\Applications\Altium\Datasheets\R0402_Phycomp_RC0402.pdf, LatestRevisionDate=17.10.2012, Manufacturer Part Number=R0402_20K_1%_0.0625W_100PPM, Mounted=Yes, Part Description="General Purpose Thick Film Chip Resistor", Part Number=R0402_20K_1%_0.0625W_100PPM, Pin Count=2, PressFit=No, Sense=No, SMD=Yes, Socket=No, Status="Not Recommended", TC=±100ppm/°C
R225: library part R0402_3K9_1%_0.0625W_100PPM, "Resistor - 1%", Case=0402, Manufacturer=GENERIC, Manufacturer1 ComponentHeight=0.4mm, Manufacturer1 Example="YAGEO PHYCOMP", Manufacturer1 Part Number=232270673902L, Power=0.0625W, Tolerance=±1%, Author="CERN DEM JLC", Component Type=Standard, CreateDate=03.12.2007, HelpURL=\\cern.ch\dfs\Applications\Altium\Datasheets\R0402_Phycomp_RC0402.pdf, LatestRevisionDate=17.10.2012, Manufacturer Part Number=R0402_3K9_1%_0.0625W_100PPM, Mounted=Yes, Part Description="General Purpose Thick Film Chip Resistor", Part Number=R0402_3K9_1%_0.0625W_100PPM, Pin Count=2, PressFit=No, Sense=No, SMD=Yes, Socket=No, Status="Not Recommended", TC=±100ppm/°C
SCREW200 SCREW201: library part MECH_SCREW_M1.6x4, "Screw", Manufacturer=BOSSARD, Manufacturer Part Number=B1.6X4/BN660, Part Number=BOSSARD_B1.6X4/BN660, Author=GK, Component Type=Mechanical, ComponentHeight=1mm, CreateDate=04.12.2015, HelpURL=\\cern.ch\dfs\Applications\Altium\Datasheets\BOSSARD_BN650-1243721.pdf, LatestRevisionDate=04.12.2015, Mounted=Yes, PackageDescription="M1.6 L=4mm Philips Head Machine Screw, DIN 7985A, Stainless Steel A2", Part Description="M1.6 L=4mm Philips Head Machine Screw, DIN 7985A, Stainless Steel A2", Pin Count=0, PressFit=No, Sense=No, SMD=No, Socket=No, Status=None
T200: "60 V, 115 mA, Dual N-Channel Field Effect Transistor, Enhancement Mode", Case=SOT363, Manufacturer="ON SEMICONDUCTOR", Author="CERN DEM BC", Bonding=No, Component Type=Standard, ComponentHeight=1.1mm, CreateDate=25.11.2020, Device=2N7002DW, HelpURL=\\cern.ch\dfs\Applications\Altium\Datasheets\2N7002DW.pdf, LatestRevisionDate=25.11.2020, Manufacturer Part Number=2N7002DW, Mounted=Yes, PackageDescription="SOT363, SC70-6, 0.65mm Pitch; 6 Pin, 1.25mm W X 2.00mm L X 1.10mm H body, IPC Medium Density", Part Description="60V 115mA Dual N-Channel Field Effect Transistor, Enhancement Mode", Part Number=2N7002DW, Pin Count=6, PressFit=No, Sense=No, SMD=Yes, Socket=No
TP200 TP201 TP202 TP203 TP204 TP205 TP206 TP207 TP208 TP209 TP210 TP211 TP212 TP213: library part SMD_PAD_1.27X1.27MM, Author="CERN DEM JLC", Component Type="Standard (No BOM)", ComponentHeight=0mm, CreateDate=12.01.2008, Family="Test Point", HelpURL=Undefined, LatestRevisionDate=12.01.2008, Mounted=No, PackageDescription="1.27mm x 1.27mm PCB Copper Area (SMD Test Point)", Part Description="1.27mm x 1.27mm PCB Copper Area (SMD Test Point)", Part Number=SMD_PAD_1.27X1.27MM, Pin Count=1, Sense=No, SMD=Yes, Socket=No, Status=None

## Via types
v1: diameter 0.5, hole 0.2, TOP to BOTTOM, tented both sides, 160 vias
v2: diameter 0.5, hole 0.2, TOP to BOTTOM, 24 vias
v3: diameter 0.4, hole 0.15, TOP to BOTTOM, tented both sides, 14 vias
v4: diameter 0.4, hole 0.2, TOP to BOTTOM, tented both sides, 12 vias
v5: diameter 0.7, hole 0.4, TOP to BOTTOM, tented both sides, 3 vias